# Altium PCB fader2_pcb.PcbDoc (part 2 of 3)
Units mil, origin at the board's own origin, x right, y up, seen from the top; angles counter-clockwise.
Board outline 5700 x 3900 mil, 6 copper layers (TOP, GND1, PWR1, PWR2, GND4, BOT), stack 48.468 mil thick; 196 components, 127 nets, 1359 pads, 531 vias.
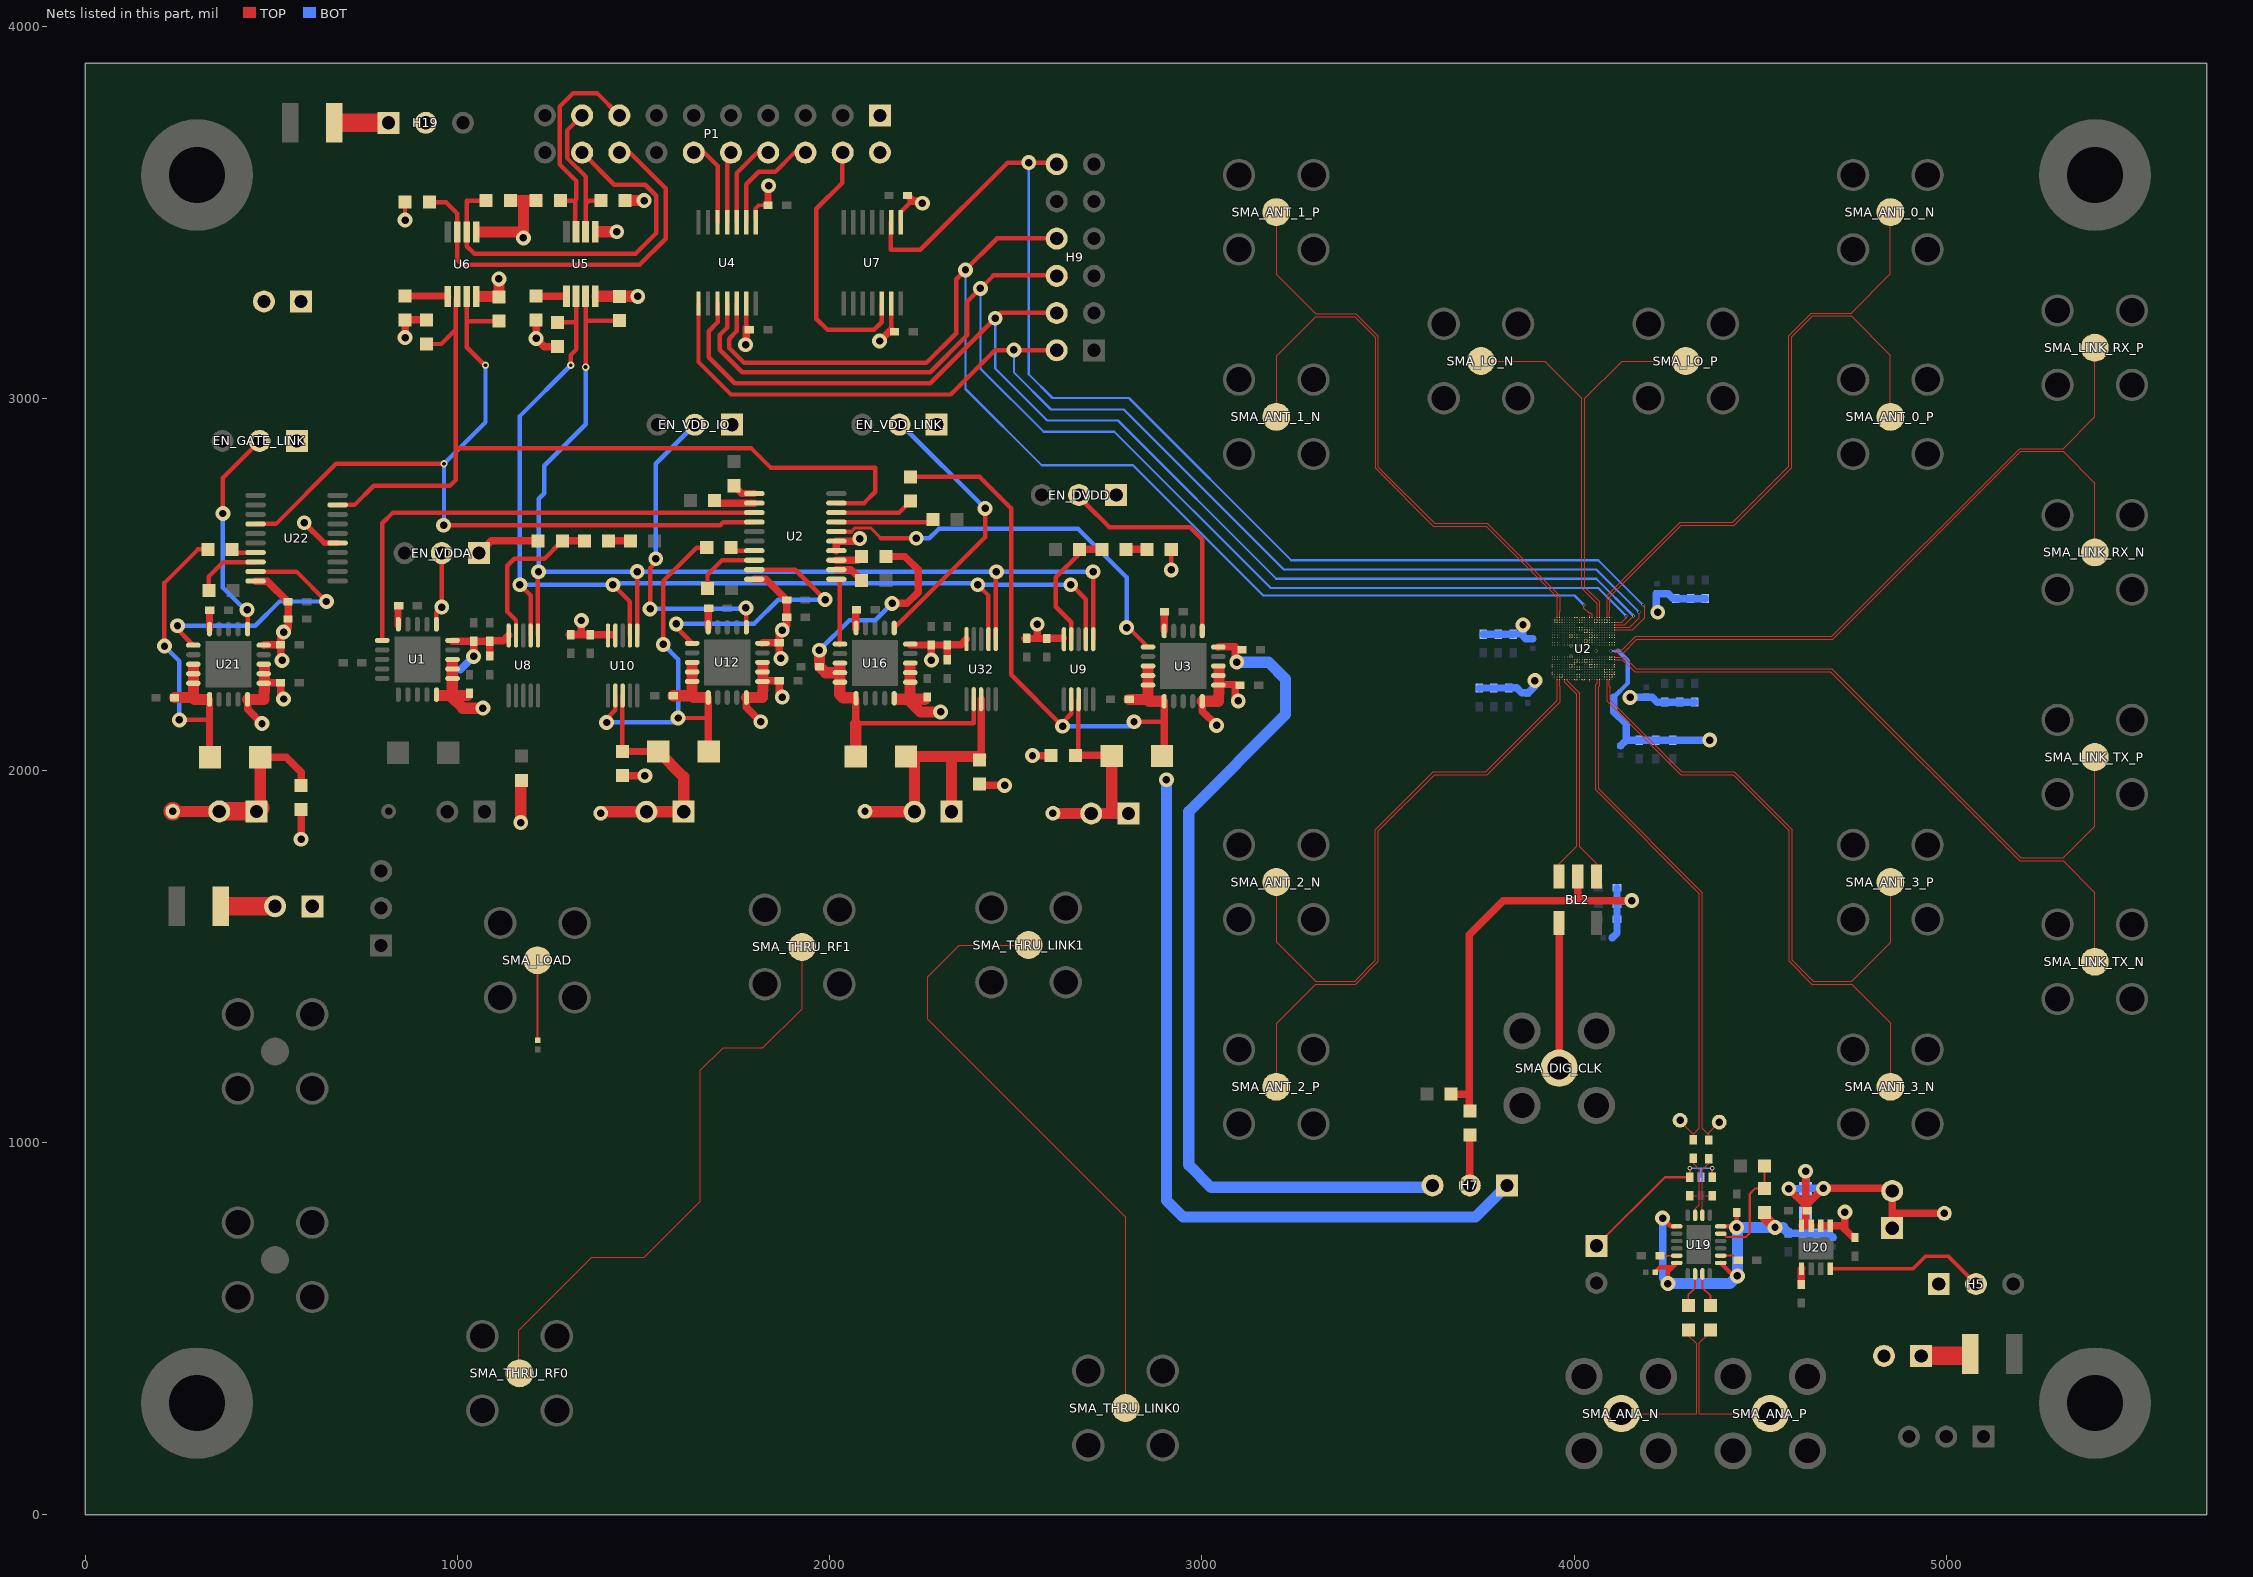
[diagram p6: the nets of this part, all layers, seen from the top]

## Part data
BL2: "Balun", Frequency Range=0.5MHz-550MHz, Manufacturer=Mini-Circuits, Manufacturer ID=TC1.5-52TG2+
C1 C4 C13 C14 C18 C19 C25 C29 C32 C34 C46 C48 C52 C64 C65 C66 C70 C78 C86 C99 C105 C113 C115: library part "cap 3p3uF", Manufacturer=TDK, Manufacturer ID=C1005X5R1A335K050BC, Package=0402, Digikey ID=445-13819-1-ND
C2 C23 C31 C33 C37 C38 C40 C90 C92 C95 C104 C114: library part "cap 1uF 0402", Manufacturer="Samsung Electro-Mechanics", Manufacturer ID=CL05A105MO5NNNC, Package=0402, Digikey ID=1276-1447-1-ND
C3 C17 C26 C47 C63 C69 C71 C75 C77: library part "cap 100nF", Manufacturer="Samsung Electro-Mechanics", Manufacturer ID=CL05B104KO5NNNC, Package=0402, Digikey ID=1276-1001-1-ND
C5 C21 C36 C39 C43 C50 C62 C84 C85 C88 C91 C96 C98 C102 C117: library part "cap 10nF", Manufacturer=Murata, Manufacturer ID=GCM155R71H103KA55D, Package=0402, Digikey ID=490-4762-1-ND
C6 C22 C51 C89 C100 C103 C118: library part "cap 100pF", Manufacturer=Murata, Manufacturer ID=GRM0335C1H101JA01D, Package=0201, Digikey ID=490-6113-1-ND
C8 C10 C67: library part "cap 22uF", Manufacturer=Murata, Manufacturer ID=GRM32ER71C226KE18L, Package=1210, Digikey ID=490-4524-1-ND
C11 C12: library part "cap 1uF 0603", Manufacturer=Murata, Manufacturer ID=GRM188R61A105KA61D, Package=0603, Digikey ID=490-1543-1-ND
C20 C30 C35 C49 C53 C87 C116: library part "cap 220nF", Manufacturer="Samsung Electro-Mechanics", Manufacturer ID=CL05B224KO5NNNC, Package=0402, Digikey ID=1276-1176-1-ND
C76: library part "cap 680pF", Manufacturer=Murata, Manufacturer ID=GRM0335C1E681JA01D, Package=0201, Digikey ID=490-14330-1-ND
EN_DVDD EN_GATE_LINK EN_VDD_IO EN_VDD_LINK EN_VDDA H5 H7 H16 H18 H19: Manufacturer=FCI, Manufacturer ID=68000-103HLF, Digikey ID=609-3461-ND
FB1 FB3 FB4 FB5 FB7 FB10: Current Rating=2A, Manufacturer=Wurth, Manufacturer ID=742792641, Package=0603, Digikey ID=732-1592-1-ND, Impedance="300 Ohm @ 100MHz"
H9: "Header, 6-Pin, Dual row", Manufacturer="Amphenol FCI", Manufacturer ID=67997-212HLF, Digikey ID=609-3237-ND
H13 H15 H17 H20 H25 H_DVDD H_GATE_LINK H_VDD_IO H_VDD_LINK H_VDDA: Manufacturer=FCI, Manufacturer ID=68001-202HLF, Digikey ID=609-3469-ND
P1: "Header, 10-Pin, Dual row", Manufacturer="Amphenol FCI", Manufacturer ID=67997-220HLF, Digikey ID=609-3239-ND
R1 R72: library part "res 1.5 Kohm", Manufacturer=Panasonic, Manufacturer ID=ERA-3AEB152V, Package=0603, Digikey ID=P1.5KDBCT-ND
R2: library part "res 4.32 Kohm", Manufacturer=Panasonic, Manufacturer ID=ERA-3AEB4321V, Package=0603, Digikey ID=P4.32KDBCT-ND
R3: library part "res 930 ohm", Manufacturer=Yageo, Manufacturer ID=RT0603DRD07931RL, Package=0603, Digikey ID=311-2391-1-ND
R4 R24 R38 R39 R41: library part "res 0.11 ohm", Manufacturer=Susumu, Manufacturer ID=RL1632R-R110-F, Package=1206, Digikey ID=RL16R.11FCT-ND
R5: library part "res 3 Kohm", Manufacturer=Panasonic, Manufacturer ID=ERA-3AEB302V, Package=0603, Digikey ID=P3.0KDBCT-ND
R6 R40: library part "res 2.67 Kohm", Manufacturer=Panasonic, Manufacturer ID=ERA-3AEB2671V, Package=0603, Digikey ID=P2.67KDBCT-ND
R8: library part "res 3.5 Kohm", Manufacturer=Panasonic, Manufacturer ID=ERA-3AEB3481V, Package=0603, Digikey ID=P3.48KDBCT-ND
R9 R30 R51 R52: library part "res 0 ohm 0603", Manufacturer=Panasonic, Manufacturer ID=ERJ-3GEY0R00V, Package=0603, Digikey ID=P0.0GCT-ND
R11 R12 R13 R14 R15 R16 R17 R18 R19 R20: library part "res 10 Kohm", Manufacturer=Panasonic, Manufacturer ID=ERA-3AEB103V, Package=0603, Digikey ID=P10KDBCT-ND
R21 R22 R23 R31 R32 R33: library part "res 1 Kohm", Manufacturer=Panasonic, Manufacturer ID=ERJ-3EKF1001V, Package=0603, Digikey ID=P1.00KHCT-ND
R36: library part "res 13 Kohm", Manufacturer=Panasonic, Manufacturer ID=ERA-3AEB133V, Package=0603, Digikey ID=P13KDBCT-ND
R44: library part "res 50 ohm", Manufacturer=Panasonic, Manufacturer ID=ERJ-1GEF49R9C, Package=0201, Digikey ID=P49.9ABCT-ND
R46 R47: library part "res 20 Kohm", Manufacturer=Panasonic, Manufacturer ID=ERJ-2RKF2002X, Package=0402, Digikey ID=P20.0KLCT-ND
R73: library part "res 300 ohm", Manufacturer=Panasonic, Manufacturer ID=ERA-3AEB301V, Package=0603, Digikey ID=P300DBCT-ND
SMA_ANA_N SMA_ANA_P: library part SMA_JOHNSON, "Johnson SMA", Manufacturer=Molex, Manufacturer ID=0733910060, Digikey ID=WM5543-ND
SMA_ANT_0_N SMA_ANT_0_P SMA_ANT_1_N SMA_ANT_1_P SMA_ANT_2_N SMA_ANT_2_P SMA_ANT_3_N SMA_ANT_3_P SMA_LINK_RX_N SMA_LINK_RX_P SMA_LINK_TX_N SMA_LINK_TX_P SMA_LO_N SMA_LO_P SMA_LOAD SMA_OPEN SMA_SHORT SMA_THRU_LINK0 SMA_THRU_LINK1 SMA_THRU_RF0 SMA_THRU_RF1: library part SMA_THRU_SMD, Manufacturer=Amphenol, Manufacturer ID=132134-15, Digikey ID=ACX1962-ND
SMA_DIG_CLK: library part SMA_JOHNSON_CUTOUT, "Johnson SMA With Cutout", Manufacturer=Molex, Manufacturer ID=0733910060, Digikey ID=WM5543-ND
TP_ANA_N TP_ANA_P TP_DVDD TP_GATE_LINK TP_VDD_BUFFER TP_VDD_IO TP_VDD_LINK TP_VDDA: library part Test_Point
U1 U3 U12 U16 U21: "Variable Voltage Regulator", Dropout Voltage="55mV @ 1.5A", Input Voltage=0.86V-5.5V, Manufacturer=TI, Manufacturer ID=TPS74201RGWR, Output Current=1.5A, Output Voltage=0.8V-3.6V, Digikey ID=296-19890-1-ND
U2: library part FADER2
U2 U22: "Digital Pot", Manufacturer="Analog Devices", Manufacturer ID=AD5254BRUZ1, Resistance=1k, Digikey ID=AD5254BRUZ1-ND
U4 U7: library part NLSV4T244, "Logic Translator", Manufacturer="ON Semiconductor", Package=TSSOP-14, Voltage Range=0.9V-4.5V, Digikey ID=NLSV4T244DTR2GOSCT-ND, Manufacturer ID=NLSV4T244DTR2G, Num. Channels=4
U5 U6: "I2C Repeater", Manufacturer=TI, Manufacturer ID=PCA9517DGKR, Package=8-VSSOP, Voltage Range A=0.9V-5.5V, Voltage Range B=2.7V-5.5V, Digikey ID=296-24730-1-ND
U8 U9 U10 U32: "OpAmp ADC", Manufacturer=Maxim, Manufacturer ID=MAX9612AUB+, Digikey ID=MAX9612AUB+-ND
U19: library part LTC6417CUDC#PBF, "Single Channel, Low Noise, High Linearity Differential Buffer / 16-Bit ADC Driver with Fast Clamp, 1600 MHz Typical GBW, 10000 V/us Typical SR, 4.75 to 5.25 V, 20-Pin QFN (UDC20), Commercial, Pb-Free", Manufacturer="Linear Technology", Supplier Part Number 1=LTC6417CUDC#PBF-ND, Channels (#)=1, ComponentLink1Description="Manufacturer URL", ComponentLink1URL=http://www.linear.com/, ComponentLink2Description=Datasheet, ComponentLink2URL=http://cds.linear.com/docs/en/datasheet/6417f.pdf, ComponentLink3Description="Package Specification", ComponentLink3URL=http://cds.linear.com/docs/en/packaging/QFN_20_05-08-1742.pdf, Digikey ID=LTC6417CUDC#PBF-ND, GBW (MHz) Typical=1600, Is (mA) Typical=123, Linear Technology Part Number=LTC6417, Manufacturer ID=LTC6417CUDC#PBF, Mounting Technology="Surface Mount", PackageDescription="20-Lead Plastic QFN, Body 3 x 4 mm, Pitch 0.5 mm", PackageReference=LT-UDC-20, PackageVersion="Rev Ø", PartNumber=LTC6417CUDC#PBF, RoHS=Pb-Free, SR (V/us) Typical=10000, Supplier 1=Digi-Key, Supplier 2=Farnell, Supplier 3=Newark, Supplier Part Number 2=2322431, Supplier Part Number 3=27W9503, Type=DIFF, Vos (mV) Typical=0.1, Vs Max (V)=5.25, Vs Min (V)=4.75
U20: library part TPS79650DRBR, "Single Output High PSRR LDO, 1 A, Fixed 5 V Output, 2.7 to 5.5 V Input, 8-pin SON (DRB), -40 to 125 degC, Green (RoHS & no Sb/Br)", Manufacturer="Texas Instruments", Supplier Part Number 1=296-21352-2-ND, Accuracy(%)=2, ComponentLink1Description="Manufacturer URL", ComponentLink1URL=http://www.ti.com/, ComponentLink2Description=Datasheet, ComponentLink2URL=http://www.ti.com/general/docs/lit/getliterature.tsp?genericPartNumber=TPS79650&fileType=pdf, ComponentLink3Description="Package Specification", ComponentLink3URL=http://www.ti.com/litv/pdf/mpds118h, DatasheetVersion=SLVS351N, Digikey ID=296-21352-1-ND, Eco-Plan="Green (RoHS & no Sb/Br)", Fixed Output Options(V)=5, Iout(Max)(A)=1, Iq(Typ)(mA)=0.26, Manufacturer ID=TPS79650DRBR, Mounting Technology="Surface Mount", PackageDescription="8-Pin Plastic Small Outline, Body 3 x 3 mm, Pitch 0.65 mm", PackageReference=DRB8-2400X1650TP, PackageVersion=4203482-2/K, PartNumber=TPS79650DRBR, SubFamily="Single Channel LDO", Supplier 1=Digi-Key, Supplier 2=Digi-Key, Supplier 3=Digi-Key, Supplier 4=Newark, Supplier 5=Mouser, Supplier Part Number 2=296-21352-1-ND, Supplier Part Number 3=296-21352-6-ND, Supplier Part Number 4=22M1831, Supplier Part Number 5=595-TPS79650DRBR, Vdo(Typ)(mV)=200, Vin(Max)(V)=5.5, Vin(Min)(V)=2.7, Vout Adj(Max)(V)=5, Vout Adj(Min)(V)=5

## Free pads (board coordinates)
  round 300 hole 150: 0(300,300) 0(300,3600) 0(5400,300) 0(5400,3600)

## Via types
v1: diameter 50, hole 28, TOP to BOT, 259 vias
v2: diameter 40, hole 20, TOP to BOT, tented both sides, 128 vias
v3: diameter 8, hole 6, TOP to BOT, tented both sides, 63 vias
v4: diameter 20, hole 10, TOP to BOT, 45 vias
v5: diameter 16, hole 6, TOP to BOT, tented both sides, 17 vias
v6: diameter 8, hole 6, TOP to BOT, 7 vias
v7: diameter 40, hole 20, TOP to BOT, 4 vias
v8: diameter 20, hole 10, TOP to BOT, tented both sides, 4 vias
v9: diameter 19.68, hole 7.87, TOP to BOT, 2 vias
v10: diameter 12, hole 6, TOP to BOT, tented both sides, 2 vias

## Nets (pads, with @x,y where several pads share a name; then routed paths per layer and width w, separated by ;. In a path a pad name is that pad's centre, name@x,y a point inside that pad or via, vN(x,y) a via of type N, cw(c..) or ccw(c..) an arc to the next point about the centre after c; other vN are vias at no path point)
ANA_MUX_N: C84.1 TP_ANA_N.1 U2.H26 | length 1399
  TOP w3: U2.H26@4061.85,2244.21 U2.H26@4061.85,2243.89 4061.85,2234.15 4057.96,2230.26 4057.96,1947.62 4337.05,1668.53 4337.05,1039.05 4320,1022 4285,1057 TP_ANA_N.1@4285,1060
ANA_MUX_P: C85.1 TP_ANA_P.1 U2.G26 | length 1392
  TOP w3: U2.G26@4068.55,2244.21 U2.G26@4068.55,2243.89 4068.55,2226.83 4066.62,2224.9 4066.62,1950.13 4344.94,1671.8 4344.94,1038.05 4362,1021 4362,1027 TP_ANA_P.1@4390,1055
ANT_0_N: SMA_ANT_0_N.1 U2.D1 | length 1549.7
  TOP w3: U2.D1@4088.63,2411.22 4088.63,2428.63 ; 4088.73,2428.63 4088.73,2470.1 4284.84,2666.22 4426.22,2666.22 4577.11,2817.11 4577.11,3168.27 4637.79,3228.94 4745,3228.94 4850,3333.94 SMA_ANT_0_N.1@4850,3500
ANT_0_P: SMA_ANT_0_P.1 U2.C1 | length 1537.2
  TOP w3: U2.C1@4095.32,2411.22 4095.32,2428.63 4096.62,2429.92 4096.62,2466.83 4288.11,2658.33 4429.49,2658.33 4431.8,2660.64 4585,2813.84 4585,3165 4641.05,3221.05 4745,3221.05 4850,3116.05 SMA_ANT_0_P.1@4850,2950
ANT_1_N: SMA_ANT_1_N.1 U2.AD1 | length 1534.4
  TOP w3: SMA_ANT_1_N.1@3201.7,2947.83 3201.7,3113.89 3306.7,3218.89 3410.64,3218.89 3466.7,3162.83 3466.7,2811.67 3622.21,2656.16 3763.59,2656.16 3954.77,2464.98 U2.AD1@3954.77,2411.22
ANT_1_P: SMA_ANT_1_P.1 U2.AC1 | length 1549.7
  TOP w3: SMA_ANT_1_P.1@3201.7,3497.83 3201.7,3331.78 3306.7,3226.78 3413.91,3226.78 3474.59,3166.1 3474.59,2814.94 3625.48,2664.05 3766.85,2664.05 3962.97,2467.93 3962.97,2426.46 ; U2.AC1@3961.46,2411.22 3961.46,2428.63
ANT_2_N: SMA_ANT_2_N.1 U2.AD26 | length 1536.7
  TOP w3: SMA_ANT_2_N.1@3201.53,1705 3201.53,1538.95 3306.53,1433.95 3410.47,1433.95 3466.53,1490 3466.53,1841.16 3622.04,1996.67 3763.42,1996.67 3954.77,2188.02 U2.AD26@3954.77,2243.9
ANT_2_P: SMA_ANT_2_P.1 U2.AC26 | length 1549.7
  TOP w3: SMA_ANT_2_P.1@3201.53,1155 3201.53,1321.06 3306.53,1426.06 3413.74,1426.06 3474.42,1486.73 3474.42,1837.89 3625.31,1988.78 3766.68,1988.78 3962.8,2184.9 3962.8,2226.37 ; 3961.46,2226.49 U2.AC26@3961.46,2243.9
ANT_3_N: SMA_ANT_3_N.1 U2.D26 | length 1552.6
  TOP w3: U2.D26@4088.63,2243.89 4088.63,2186.37 4286.22,1988.78 4427.59,1988.78 4578.48,1837.89 4578.48,1486.73 4639.16,1426.06 4746.37,1426.06 4851.37,1321.06 SMA_ANT_3_N.1@4851.37,1155 ; SMA_ANT_3_N.1@4848.5,1151.5 SMA_ANT_3_N.1@4850,1150
ANT_3_P: SMA_ANT_3_P.1 U2.C26 | length 1540
  TOP w3: U2.C26@4095.32,2243.89 4095.32,2226.49 4097.99,2223.81 4097.99,2188.17 4289.49,1996.67 4430.86,1996.67 4586.37,1841.16 4586.37,1490 4642.43,1433.95 4746.37,1433.95 4851.37,1538.95 SMA_ANT_3_P.1@4851.37,1705 ; SMA_ANT_3_P.1@4848.5,1698.5 SMA_ANT_3_P.1@4850,1700
buf_vcm_in: C17.1 H13.1 R46.2 R47.1 | length 459.5
  TOP w5: R46.2@4311.21,907.06 v10(4311.21,931.06) ; R47.1@4371.21,907.06 v10(4371.21,931.06)
  TOP w5.75: H13.1@4060.05,722.67 4244.38,907 4311.16,907 R46.2@4311.21,907.06
  BOT w5: v10(4311.21,931.06) 4341.21,931.06 ; C17.1@4341.21,907.06 4341.21,931.06 ; v10(4371.21,931.06) 4341.21,931.06
CLK_DIG_OVERRIDE_N: BL2.1 U2.AA26 | length 562.1
  TOP w3: BL2.1@3960,1715 3960,1749 4007.11,1796.11 4007.11,2204.03 3974.84,2236.3 U2.AA26@3974.84,2243.9 U2.AA26@3974.84,2244.21
CLK_DIG_OVERRIDE_P: BL2.3 U2.Y26 | length 561.7
  TOP w3: U2.Y26@3981.54,2244.21 U2.Y26@3981.54,2243.89 3981.54,2240.76 4015,2207.3 4015,1795 4060,1750 BL2.3@4060,1715
CLK_DIG_OVERRIDE_SMA: BL2.6 SMA_DIG_CLK.1 | length 385
  TOP w20: SMA_DIG_CLK.1@3960,1200 BL2.6@3960,1585
CLK_DIG_OVERRIDE_VCM: BL2.2 C30.1 C98.1 C99.1 C100.1 R2.1 R36.2 | length 1202.4
  TOP w20: 3690.5,1130 3718,1130 ; R36.2@3718,1102 3718,1130 ; BL2.2@4010,1710 4010,1650 ; v2(4155,1650) 4010,1650 ; 3718,1130 3718,1558 3810,1650 4010,1650
  BOT w20: C100.1@4103,1550 4115.5,1562.5 C98.1@4115.5,1600 C30.1@4115.5,1640 ; C99.1@4115.5,1685 C30.1@4115.5,1640 ; v2(4155,1650) 4125.5,1650 C30.1@4115.5,1640
DVDD: C19.1 C20.1 C21.1 C22.1 FB3.2 U2.AA12 U2.AA13 U2.AA16 U2.AA17 U2.B22 U2.B23 U2.C22 U2.C23 U2.D22 U2.D23 U2.E22 U2.E23 U2.F2 U2.F3 U2.F14 U2.F15 U2.G2 U2.G3 U2.G14 U2.G15 U2.H2 U2.H3 U2.H8 U2.H9 U2.H14 U2.H15 U2.H20 U2.H21 U2.J2 U2.J3 U2.J8 U2.J9 U2.J14 U2.J15 U2.J20 U2.J21 U2.K6 U2.K7 U2.K8 U2.K9 U2.K18 U2.K19 U2.K20 U2.K21 U2.L6 U2.L7 U2.L8 U2.L9 U2.L18 U2.L19 U2.L20 U2.L21 U2.M6 U2.M7 U2.M18 U2.M19 U2.N6 U2.N7 U2.N18 U2.N19 U2.P18 U2.P19 U2.R18 U2.R19 U2.T8 U2.T9 U2.T18 U2.T19 U2.U8 U2.U9 U2.U18 U2.U19 U2.U20 U2.U21 U2.V8 U2.V9 U2.V12 U2.V13 U2.V16 U2.V17 U2.V20 U2.V21 U2.W8 U2.W9 U2.W12 U2.W13 U2.W16 U2.W17 U2.W20 U2.W21 U2.Y12 U2.Y13 U2.Y16 U2.Y17 | length 234.2
  TOP w3: U2.U20@4001.62,2284.05 U2.U19@4001.62,2290.74
  TOP w20: v2(2545,2040) FB3.2@2595,2040
  BOT w10: C22.1@3876.84,2208.72 C22.1@3877.1,2208.72
  BOT w20: C19.1@3744.84,2221.22 3784.84,2221.44 3824.84,2221.66 3845.84,2221.78 3858.9,2208.72 C22.1@3876.84,2208.72 ; C22.1@3877.1,2208.72 3894.84,2226.47 v2(3894.84,2241.22)
  other v3: 4085.17,2267.51 3991.37,2280.8 4044.97,2280.83 4004.96,2294.14 4031.51,2294.08 3991.68,2307.62 4058.47,2321 3991.72,2334.42 3991.66,2361.08 4045.11,2361.05 4031.65,2374.4 4058.7,2401.3
DVDD_EN: EN_DVDD.2 U3.11 | length 600.2
  TOP w12: EN_DVDD.2@2687,2718 2751.17,2653.83 2967.82,2653.83 3001.18,2620.46 U3.11@3001.18,2374.8
DVDD_FB: U2.6 U3.16 | length 1070.7
  TOP w8: 2058.6,2641.62 2068.81,2651.83 2109.82,2651.83 2137.82,2623.83
  TOP w12: U2.6@2018.05,2641.62 2058.6,2641.62 ; 2137.82,2623.83 v2(2232.82,2623.83) ; v2@2801.82,2385.19 U3.16@2855.51,2331.5
  BOT w12: v2(2232.82,2623.83) 2267.82,2623.83 2292.82,2648.83 2667.82,2648.83 2797.82,2518.83 v2(2797.82,2383.83)
DVDD_REG: C104.1 R41.1 R52.2 U3.1 U3.18 U3.19 U3.20 U9.2 | length 1600.1
  TOP w12: R52.2@2217.82,2788.83 2402.82,2788.83 2487.82,2703.83 2487.82,2256.83 v2(2625.82,2118.83) 2625.82,2128.83 2649.13,2152.14 U9.2@2649.13,2191.12 ; v2(2817.82,2130.83) 2898.82,2130.83
  TOP w20: 2853.82,2190.83 2855.51,2189.13 2858.82,2185.83 ; R41.1@2898.82,2061.83 2898.82,2130.83 U3.1@2898.82,2185.83
  TOP w30: C104.1@2804.82,2190.83 2853.82,2190.83 ; 2855.51,2189.13 2855.51,2270.83 ; 2858.82,2185.83 2889.82,2185.83
  BOT w12: v2(2625.82,2118.83) 2805.82,2118.83 v2(2817.82,2130.83)
DVDD_RS: FB3.1 H_DVDD.1 H_DVDD.2 R41.2 TP_DVDD.1 U9.3 | length 609.2
  TOP w12: FB3.1@2667.82,2040.83 U9.3@2667.82,2190.12
  TOP w20: FB3.1@2667.82,2040.61 2668.04,2040.83 R41.2@2764.82,2040.83
  TOP w30: TP_DVDD.1@2599.92,1884.92 2600.69,1884.14 H_DVDD.2@2702.82,1884.14 2757.82,1884.14 ; R41.2@2764.82,2040.83 2757.82,2033.83 2757.82,1884.14 ; H_DVDD.1@2802.82,1884.14 2757.82,1884.14
FRAC13_BOT: R22.2 R23.1 U9.9 | length 344.9
  TOP w12: U9.9@2649.13,2352.54 2649.13,2398.3 2607.82,2439.61 2607.82,2518.83 2671.82,2582.83 R23.1@2671.82,2593.83
  TOP w20: R23.1@2671.82,2593.83 R22.2@2731.82,2593.83
FRAC13_TOP: R32.2 R33.1 | length 59
  TOP w20: R32.2@1405.95,2616.97 R33.1@1464.95,2616.97
FRAC23_BOT: R21.2 R22.1 | length 56
  TOP w20: R22.1@2796.82,2593.83 R21.2@2852.82,2593.83
FRAC23_TOP: R31.2 R32.1 U8.9 | length 431.8
  TOP w12: U8.9@1157.31,2362.71 1157.31,2403.33 1133.82,2426.81 1133.82,2549.83 1152.82,2568.83 1233.8,2568.83 R31.2@1281.95,2616.97
  TOP w20: R31.2@1281.95,2616.97 R32.1@1340.95,2616.97
GATE_LINK: C115.1 C116.1 C117.1 C118.1 FB7.2 U2.B14 U2.B15 U2.C14 U2.C15 | length 626.3
  TOP w20: v2(580,1815) FB7.2@580,1895
  BOT w3: C117.1@4174.84,2081.22 C117.1@4174.93,2081.14
  BOT w6: v3(4098.76,2321) 4118.83,2321
  BOT w12: 4106.93,2196.93 4145,2235 4145,2294.84 4118.83,2321
  BOT w20: 4106.93,2196.93 4106.93,2157.71 4139.84,2124.79 4139.84,2081.22 ; C118.1@4124.84,2066.22 4139.84,2081.22 ; C117.1@4174.84,2081.22 4139.84,2081.22 ; C117.1@4174.93,2081.14 C115.1@4265.26,2081.14 v2@4364.84,2081.14
  other v2: 4364.84,2081.22
GATE_LINK_EN: EN_GATE_LINK.2 U21.11 | length 579.8
  TOP w12: v2(369.82,2690.32) 369.82,2786.73 EN_GATE_LINK.2@468.41,2885.32 ; v2(434.82,2431.83) 436.18,2430.46 U21.11@436.18,2379.8
  BOT w12: v2(369.82,2690.32) 369.82,2490.83 431.82,2428.83 v2(434.82,2431.83)
GATE_LINK_FB: U21.16 U22.19 | length 726.4
  TOP w12: v2@236.82,2390.19 U21.16@290.51,2336.5 ; U22.19@457.58,2534.26 567.38,2534.26 v2(647.82,2453.83)
  BOT w12: v2(247.82,2388.83) 456.83,2388.83 521.83,2453.83 v2(647.82,2453.83)
GATE_LINK_REG: C114.1 R4.1 R73.2 U21.1 U21.18 U21.19 U21.20 | length 918.6
  TOP w12: v2@212.82,2327.83 v2(212.82,2333.83) 212.82,2503.83 302.82,2593.83 R73.2@329.82,2593.83 ; v2(252.82,2135.83) 333.82,2135.83
  TOP w20: 288.82,2195.83 290.51,2194.13 293.82,2190.83 ; 333.82,2066.83 333.82,2135.83 U21.1@333.82,2190.83
  TOP w30: C114.1@239.82,2195.83 288.82,2195.83 ; 290.51,2194.13 290.51,2275.83 ; 293.82,2190.83 324.82,2190.83
  BOT w12: v2(212.82,2333.83) 252.82,2293.83 v2(252.82,2135.83)
GATE_LINK_RS: FB7.1 H_GATE_LINK.1 H_GATE_LINK.2 R4.2 TP_GATE_LINK.1 | length 535.7
  TOP w20: R4.2@470,2035 540,2035 580,1995 FB7.1@580,1960
  TOP w30: TP_GATE_LINK.1@235,1890 H_GATE_LINK.2@360,1890 ; H_GATE_LINK.1@470,1900 R4.2@470,2035
  TOP w50: H_GATE_LINK.2@360,1890 H_GATE_LINK.1@460,1890 H_GATE_LINK.1@470,1900
I2C_SCL_I: R13.2 U5.7 U8.6 U9.6 U10.6 U32.6 | length 3080.6
  TOP w12: U8.6@1216.31,2362.65 v2@1216.31,2533.83 ; v8@1344.12,3083.94 1344.12,3204.74 ; U5.7@1344.12,3274.12 1344.12,3204.74 ; R13.2@1435.33,3208.74 1348.12,3208.74 1344.12,3204.74 ; U10.6@1483.19,2362.54 v2(1483.19,2534.2) ; U32.6@2446.31,2352.65 v2@2446.31,2533.83 ; v2(2707.82,2533.83) 2708.19,2533.46 U9.6@2708.19,2352.54
  BOT w12: v2(1217.82,2533.83) v2@1218.19,2534.2 ; v8(1344.33,3083.74) 1344.33,2930.34 1232.82,2818.83 1232.82,2744.83 1218.19,2730.2 v2@1218.19,2534.2 ; v2(2707.82,2533.83) v2(2447.82,2533.83) 1483.56,2533.83 v2(1483.19,2534.2) v2@1218.19,2534.2
I2C_SCL_I_FPGA: P1.17 R11.2 U5.2 | length 393.6
  TOP w12: P1.17@1334.33,3759.33 1294.41,3719.41 1294.41,3645.66 1345.33,3594.74 1345.33,3522.74 ; U5.2@1344.12,3447.35 1345.33,3448.56 1345.33,3522.74 ; R11.2@1385.33,3531.18 1353.77,3531.18 1345.33,3522.74
I2C_SCL_V: R17.2 U2.14 U6.7 U22.14 | length 2180.3
  TOP w12: U22.14@457.58,2662.21 512.21,2662.21 673.83,2823.83 v8(963.82,2823.83) ; v2(962.82,2658.83) 1706.05,2658.83 1714.43,2667.21 U2.14@1797.58,2667.21 ; U6.7@1025.34,3273.12 1025.34,3206.74 ; v8(1075.33,3088.74) 1073.33,3088.74 1025.34,3136.72 1025.34,3206.74 ; R17.2@1111.33,3206.96 1025.56,3206.96 1025.34,3206.74
  BOT w12: v2(962.82,2658.83) 963.82,2659.83 v8(963.82,2823.83) 1075.33,2935.34 v8(1075.33,3088.74)
I2C_SCL_V_FPGA: P1.18 R15.2 U6.2 | length 1062.2
  TOP w12: 1025.34,3531.18 U6.2@1025.34,3446.35 1025.34,3408.72 1045.33,3388.74 1479.41,3388.74 1534.41,3443.74 1534.41,3543.82 1504.41,3573.82 1421.18,3573.82 P1.18@1335,3660 ; 1025.34,3531.18 R15.2@1077.33,3531.18
I2C_SDA_I: R14.2 U5.6 U8.7 U9.7 U10.7 U32.7 | length 2997.8
  TOP w12: v2(1167.82,2498.83) 1196.62,2470.02 U8.7@1196.62,2362.65 ; R14.2@1269.33,3203.74 1318.33,3203.74 1319.33,3202.74 ; v8(1304.41,3088.82) 1304.41,3116.09 1319.33,3131.01 1319.33,3202.74 ; U5.6@1318.53,3274.12 1319.33,3273.33 1319.33,3202.74 ; v2(1417.82,2498.83) 1463.5,2453.14 U10.7@1463.5,2362.54 ; v2(2397.82,2498.83) 2426.62,2470.02 U32.7@2426.62,2352.65 ; v2(2647.82,2498.83) 2649.82,2498.83 2688.5,2460.14 U9.7@2688.5,2352.54
  BOT w12: v8(1304.41,3088.82) 1167.82,2952.23 v2(1167.82,2498.83) v2(1417.82,2498.83) 1421.82,2502.83 2393.82,2502.83 v2(2397.82,2498.83) v2(2647.82,2498.83)
I2C_SDA_I_FPGA: P1.15 R12.2 U5.3 | length 597.5
  TOP w12: R12.2@1276.33,3531.18 1316.53,3531.18 ; U5.3@1318.53,3447.35 1316.53,3449.35 1316.53,3531.18 ; P1.15@1435,3760 1375,3820 1311.1,3820 1274.41,3783.3 1274.41,3628.82 1319.41,3583.82 1319.41,3534.06 1316.53,3531.18
I2C_SDA_V: R18.2 U2.9 U6.6 U22.9 | length 2264.8
  TOP w12: U22.9@678.05,2713.39 723.39,2713.39 775,2765 980,2765 995.33,2780.33 995.33,2865 ; R18.2@917.33,3145.74 956.33,3145.74 995.33,3184.74 ; U6.6@999.75,3273.12 995.33,3268.7 995.33,3184.74 ; U2.9@2018.05,2718.39 2092.39,2718.39 2122.82,2748.83 2122.82,2813.83 1841.17,2813.83 1790,2865 995.33,2865 ; 995.33,2865 995.33,3184.74
I2C_SDA_V_FPGA: P1.16 R16.2 U6.3 | length 1105.5
  TOP w12: R16.2@924.33,3526.74 969.33,3526.74 999.75,3496.31 U6.3@999.75,3446.35 999.75,3372.31 1013.33,3358.74 1489.33,3358.74 1559.41,3428.82 1559.41,3563.66 1463.06,3660 P1.16@1435,3660
L1: U2.L1 | length 5.9
  TOP w3: U2.L1@4041.77,2411.22 4041.77,2417.11
L26: U2.L26 | length 5.9
  TOP w3: 4041.77,2238 U2.L26@4041.77,2243.89
LINK_CM_RX_1_N: SMA_LINK_RX_N.1 U2.A15 | length 1735.1
  TOP w3: U2.A15@4108.7,2317.83 4134.47,2317.83 4168.66,2352.03 4695.4,2352.03 5200.27,2856.9 5314.21,2856.9 5399.21,2771.9 SMA_LINK_RX_N.1@5399.21,2585.85
LINK_CM_RX_1_P: SMA_LINK_RX_P.1 U2.A14 | length 1735.6
  TOP w3: U2.A14@4108.7,2324.53 4130,2324.53 4165.39,2359.92 4692.13,2359.92 5197,2864.79 5314.21,2864.79 5399.21,2949.79 SMA_LINK_RX_P.1@5399.21,3135.85
LINK_CM_TX_1_N: SMA_LINK_TX_N.1 U2.A18 | length 1737.9
  TOP w3: U2.A18@4108.7,2297.75 4130,2297.75 4162.75,2265 4688.9,2265 5197,1756.9 5314.21,1756.9 5399.21,1671.9 SMA_LINK_TX_N.1@5399.21,1485.85 SMA_LINK_TX_N.1@5397.71,1487.35
LINK_CM_TX_1_P: SMA_LINK_TX_P.1 U2.A17 | length 1737.4
  TOP w3: U2.A17@4108.7,2304.45 4135.39,2304.45 4166.95,2272.89 4692.17,2272.89 5200.27,1764.79 5314.21,1764.79 5399.21,1849.79 SMA_LINK_TX_P.1@5399.21,2035.85 SMA_LINK_TX_P.1@5397.71,2034.35
LO_OVERRIDE_N: SMA_LO_N.1 U2.H1 | length 918.2
  TOP w3: SMA_LO_N.1@3750,3100 3921.05,3100 4021.05,3000 4021.05,2488.93 4061.85,2448.13 U2.H1@4061.85,2411.22
LO_OVERRIDE_P: SMA_LO_P.1 U2.G1 | length 917.7
  TOP w3: U2.G1@4068.55,2411.22 4068.55,2452.6 4028.94,2492.2 4028.94,3000 4128.94,3100 SMA_LO_P.1@4300,3100
NetC11_1: C11.1 U19.18 | length 97.6
  TOP w5: C11.1@4306.97,557.08 C11.1@4306.97,562.08 4306.97,591.76 4325.21,610 U19.18@4325.21,647.1
NetC12_2: C12.2 U19.19 | length 104.2
  TOP w5: U19.19@4344.9,647.1 4344.9,610 4366.97,587.92 C12.2@4366.97,562.08 C12.2@4366.97,552.08
NetC18_1: C18.1 U19.15 | length 50.5
  TOP w5: C18.1@4225.05,695.84 C18.1@4231.05,695.84 U19.15@4275.53,695.84
NetC39_1: C39.1 U16.15 | length 52.8
  TOP w20: U16.15@2070.31,2380.24 2070.31,2430.24 C39.1@2072.31,2432.24
NetC43_1: C43.1 U12.15 | length 51.4
  TOP w20: U12.15@1673.82,2384.8 1673.82,2434.83 C43.1@1674.82,2435.83
NetC62_1: C62.1 U1.15 | length 52.8
  TOP w20: U1.15@840.31,2390.24 840.31,2440.24 C62.1@842.31,2442.24
NetC75_1: C75.1 U19.2 | length 52.8
  TOP w5: U19.2@4394.58,695.84 U19.2@4394.11,696.31 4428.58,696.31 C75.1@4441.05,683.84
NetC91_1: C91.1 U20.5 | length 42.6
  TOP w20: C91.1@4610.05,619 4610.05,659.31 U20.5@4611.67,660.93
NetC96_1: C96.1 U21.15 | length 51.4
  TOP w20: U21.15@333.82,2379.8 333.82,2429.83 C96.1@334.82,2430.83
NetC102_1: C102.1 U3.15 | length 51.4
  TOP w20: U3.15@2898.82,2374.8 2898.82,2424.83 C102.1@2899.82,2425.83
NetH7_2: H7.2 R36.1 | length 135
  TOP w20: H7.2@3720,885 R36.1@3720,1020
NetR1_2: R1.2 U2.2 | length 79.5
  TOP w20: U2.2@2018.05,2539.26 2057.38,2539.26 R1.2@2085.82,2510.83
NetR3_1: R3.1 U2.3 | length 71.9
  TOP w12: R3.1@2075.84,2564.85 R3.1@2085.82,2574.83
  TOP w20: U2.3@2018.05,2564.85 R3.1@2075.84,2564.85
NetR5_2: R5.2 U2.18 | length 178.9
  TOP w12: R5.2@1671.82,2488.83 1671.82,2525.83 1710.84,2564.85 U2.18@1797.58,2564.85
NetR6_2: R6.2 U2.12 | length 109.4
  TOP w20: R6.2@1690.82,2724.83 1697.25,2718.39 U2.12@1797.58,2718.39
NetR8_1: R8.1 U2.17 | length 66.2
  TOP w12: R8.1@1734.82,2598.83 1743.2,2590.44 U2.17@1797.58,2590.44
NetR9_1: R9.1 U2.11 | length 63.4
  TOP w20: R9.1@1742.82,2764.83 1763.66,2743.98 U2.11@1797.58,2743.98
NetR19_1: R19.1 U5.5 | length 81.9
  TOP w20: R19.1@1211.33,3274.74 1211.94,3274.12 U5.5@1292.94,3274.12
NetR20_1: R20.1 U6.5 | length 115.5
  TOP w20: R20.1@859.33,3274.74 972.55,3274.74 U6.5@974.16,3273.12
NetR40_2: R40.2 U2.7 | length 262.5
  TOP w12: U2.7@2018.05,2667.21 2271.2,2667.21 R40.2@2277.82,2673.83
NetR44_1: R44.1 SMA_LOAD.1 | length 216.3
  TOP w5: R44.1@1215.31,1275.14 SMA_LOAD.1@1215.31,1491.45
NetR52_1: R52.1 U2.8 | length 212.6
  TOP w12: U2.8@2018.05,2692.8 2186.79,2692.8 R52.1@2217.82,2723.83
NetR72_2: R72.2 U22.18 | length 178.9
  TOP w12: R72.2@331.82,2483.83 331.82,2520.83 370.84,2559.85 U22.18@457.58,2559.85
NetR73_1: R73.1 U22.17 | length 66.2
  TOP w12: R73.1@394.82,2593.83 403.2,2585.44 U22.17@457.58,2585.44
NetU2_A8: U2.A8 U2.A9 U2.B8 U2.B9 U2.C8 U2.C9
NetU2_A11: U2.A11 U2.A12 U2.B11 U2.B12 U2.C11 U2.C12
NetU2_A20: U2.A20 U2.A21 | length 6.7
  TOP w3: U2.A21@4108.7,2277.36 U2.A20@4108.7,2284.05
NetU2_A23: U2.A23 U2.A24 | length 6.7
  TOP w3: U2.A24@4108.7,2257.28 U2.A23@4108.7,2263.97
NetU2_AD8: U2.AD8 U2.AD9 U2.AE8 U2.AE9 U2.AF8 U2.AF9
NetU2_AD11: U2.AD11 U2.AD12 U2.AE11 U2.AE12 U2.AF11 U2.AF12
NetU2_AD14: U2.AD14 U2.AD15 U2.AE14 U2.AE15 U2.AF14 U2.AF15
NetU2_AD17: U2.AD17 U2.AD18 U2.AE17 U2.AE18 U2.AF17 U2.AF18
NetU2_AF20: U2.AF20 U2.AF21 | length 6.7
  TOP w3: U2.AF21@3941.38,2277.36 U2.AF20@3941.38,2284.05
NetU2_AF23: U2.AF23 U2.AF24 | length 6.7
  TOP w3: U2.AF24@3941.38,2257.28 U2.AF23@3941.38,2263.97
NetU2_N1: U2.N1 U2.P1 | length 6.7
  TOP w3: U2.P1@4021.7,2411.22 U2.N1@4028.39,2411.22
NetU2_N26: U2.N26 U2.P26 | length 6.7
  TOP w3: U2.P26@4021.7,2243.89 U2.N26@4028.39,2243.89
NetU2_P2: U2.P2 U2.P3 U2.R2 U2.R3
NetU2_P5: U2.P5 U2.P6 U2.R5 U2.R6
NetU2_R21: U2.R21 U2.R22 U2.T21 U2.T22
NetU2_R24: U2.R24 U2.R25 U2.T24 U2.T25
NetU2_T1: U2.T1 U2.U1 | length 6.7
  TOP w3: U2.U1@4001.62,2411.22 U2.T1@4008.31,2411.22
NetU2_T26: U2.T26 U2.U26 | length 6.7
  TOP w3: U2.U26@4001.62,2243.89 U2.T26@4008.31,2243.89
PWRADJ: R30.2 R51.1 U19.5 | length 291.2
  TOP w5.75: U19.5@4402,754.3 4410.17,746.12 4461.12,746.12 4472.05,757.05 4472.05,862 4487.05,877 R30.2@4512.05,877 ; R51.1@4507.05,932 4512.05,927 R30.2@4512.05,877 ; R30.2@4517.05,877 R30.2@4512.05,877
RESET: H9.8 U2.K1 U4.12 | length 3515.9
  TOP w3: v6(4026.62,2444.53) 4026.62,2435.79 4039.29,2423.11 4044.26,2423.11 4048.47,2418.91 U2.K1@4048.47,2411.22
  TOP w12: U4.12@1750,3254.57 1750,3180 1730,3160 1730,3135 1770,3095 2260,3095 2340,3175 2340,3320 v2(2365,3345) 2450,3430 2608.82,3430 H9.8@2610,3428.82
  BOT w6: v2(2365,3345) 2365,3025 2570,2820 2815,2820 3165,2470 4001.14,2470 v6(4026.62,2444.53)
RESET_FPGA: P1.6 U4.2 | length 296.5
  TOP w12: U4.2@1775.59,3473.07 1775.59,3575 1809.41,3608.82 1854.41,3608.82 1905.59,3660 P1.6@1935,3660
rx_buf_in_N: C84.2 R46.1 U19.9 | length 190.3
  TOP w3: R46.1@4311.21,857.06 4336.11,857.06 ; C84.2@4320,958 4320,944 4337.05,926.94 4337.05,833.67 4325.21,821.83 U19.9@4325.21,804.58
rx_buf_in_P: C85.2 R47.2 U19.8 | length 186.5
  TOP w3: U19.8@4344.9,804.58 U19.8@4344.9,804.58 4344.94,856.9 4345.1,857.06 R47.2@4371.21,857.06 ; 4344.94,857.21 4344.94,926.94 4362,944 C85.2@4362,957 C85.2@4362,958
rx_buf_out_N: C11.2 SMA_ANA_N.1 | length 428.4
  TOP w3: SMA_ANA_N.1@4127,272 4329.11,272 4329.11,459.94 C11.2@4301.97,487.08
rx_buf_out_P: C12.1 SMA_ANA_P.1 | length 430.4
  TOP w3: C12.1@4361.97,487.08 4337,462.11 4337,272 SMA_ANA_P.1@4526.97,272 SMA_ANA_P.1@4542,272
SCAN_CLK: H9.2 U2.A5 U4.8 | length 3303.9
  TOP w3: U2.A5@4108.7,2384.76 4149.76,2384.76 4175,2410 v6(4175,2425)
  TOP w12: U4.8@1647.64,3254.57 1647.64,3097.36 1735,3010 2325.51,3010 2444.33,3128.82 H9.2@2610,3128.82
  BOT w6: v2(2495,3130) 2495,3070 2595,2970 2790,2970 3220,2540 4060,2540 v6(4175,2425)
scan_clk_FPGA: P1.12 U4.5 | length 229.8
  TOP w12: P1.12@1635,3660 1663.06,3660 1698.82,3624.25 U4.5@1698.82,3473.07
SCAN_EN: H9.4 U2.A4 U4.10 | length 3404.1
  TOP w3: U2.A4@4108.7,2391.46 4136.46,2391.46 v6(4160,2415)
  TOP w12: U4.10@1698.82,3254.57 1698.82,3203.82 1675,3180 1675,3110 1745,3040 2270,3040 v2(2445,3215) 2460,3230 H9.4@2630.51,3230
  BOT w6: v2(2445,3215) 2445,3080 2585,2940 2775,2940 3200,2515 4060,2515 v6(4160,2415)
scan_en_FPGA: P1.10 U4.4 | length 191.3
  TOP w12: U4.4@1724.41,3473.07 1724.41,3649.41 P1.10@1735,3660
SCAN_IN: H9.6 U2.A3 U4.11 | length 3516.4
  TOP w3: U2.A3@4108.7,2398.15 4128.15,2398.15 4140,2410 v6(4140,2415)
  TOP w12: U4.11@1724.41,3254.57 1724.41,3189.41 1705,3170 1705,3130 1765,3070 2270,3070 2370,3170 2370,3260 v2(2405,3295) 2440,3330 2628.15,3330 H9.6@2634.33,3323.82
  BOT w6: v2(2405,3295) 2405,3080 2575,2910 2765,2910 3185,2490 4065,2490 v6(4140,2415)
scan_in_FPGA: P1.8 U4.3 | length 239.4
  TOP w12: U4.3@1750,3473.07 1750,3604.41 1805.59,3660 P1.8@1835,3660
SCAN_OUT: H9.12 U2.A6 U7.2 | length 3226.6
  TOP w3: U2.A6@4108.7,2378.07 4158.07,2378.07 4190,2410 4190,2440 v6(4185,2445)
  TOP w12: U7.2@2164.41,3474.25 2164.41,3398.82 2243.82,3398.82 2478.07,3633.07 v2(2535,3633.07) 2605.75,3633.07 H9.12@2610,3628.82
  BOT w6: v2(2535,3633.07) 2535,3064.49 2598.99,3000.5 2804.5,3000.5 3240,2565 4065,2565 v6(4185,2445)
scan_out_FPGA: P1.4 U7.12 | length 721.8
  TOP w12: P1.4@2034.33,3660 2034.33,3578.74 1964.41,3508.82 1964.41,3213.82 1994.41,3183.82 2119.41,3183.82 2140,3204.41 U7.12@2140,3254.57
THRU_LINK: SMA_THRU_LINK0.1 SMA_THRU_LINK1.1 | length 1685.8
  TOP w3: SMA_THRU_LINK1.1@2534.4,1530.91 2348.34,1530.91 2263.34,1445.91 2263.34,1331.96 2795.25,800.06 SMA_THRU_LINK0.1@2795.25,286.7
THRU_RF: SMA_THRU_RF0.1 SMA_THRU_RF1.1 | length 1606.4
  TOP w3: SMA_THRU_RF0.1@1164.64,380.1 1164.64,495.7 1360.75,691.82 1502.13,691.82 1653.02,842.71 1653.02,1193.87 1713.7,1254.55 1820.91,1254.55 1925.91,1359.55 SMA_THRU_RF1.1@1925.91,1525.6
VDD_BUFFER: C76.1 C77.1 C86.1 C87.1 C88.1 C89.1 FB5.2 R30.1 U19.1 U19.6 U19.11 U19.16 | length 1200.8
  TOP w5.75: v2@4433.94,775.06 v2(4437,772)
  TOP w12: C76.1@4218.05,651.84 4231.9,665.69 4265.05,665.69 ; v2(4238.11,797.06) 4260.11,775.06 U19.11@4276,775.06 ; v2(4252.11,621.06) 4252.11,652.74 4265.05,665.69 ; U19.16@4276,676.63 4265.05,665.69 ; U19.1@4394.11,676.63 4428.9,641.84 v2(4439.05,641.84) ; U19.6@4394.11,775.06 v2@4433.94,775.06 ; v2(4437,772) C77.1@4437,812
  TOP w30: R30.1@4512.05,812 4512.05,799.94 v2(4540,772) v2@4543.53,775.53
  BOT w20: v2(4238.11,797.06) 4238.11,635.06 v2(4252.11,621.06) ; C86.1@4576.05,757 C87.1@4614.05,757 ; FB5.2@4622.05,811 4622.05,765 C87.1@4614.05,757 ; C89.1@4696.05,745 4684.05,757 C88.1@4652.05,757 C87.1@4614.05,757
  BOT w25: 4561.05,772 C86.1@4576.05,757
  BOT w30: v2(4252.11,621.06) 4419.21,621.06 ; 4419.21,622 v2(4439.05,641.84) 4439.05,769.94 v2(4437,772) v2(4540,772) 4561.05,772
VDD_BUFFER_EN: H5.2 U20.8 | length 436.7
  TOP w10: U20.8@4688.44,660.93 4910.93,660.93 4945,695 5005,695 H5.2@5080,620
VDD_BUFFER_REG: C92.1 FB5.1 H25.1 H25.2 TP_VDD_BUFFER.1 U20.3 U20.4 | length 867.5
  TOP w20: v7(4577.05,876) 4622.05,831 ; U20.4@4611.67,777.07 U20.3@4637.26,777.07 ; 4622.05,782.08 4622.05,831 ; v7@4622.05,919 4622.05,831 ; v7(4622.05,923) v7@4626.05,919 ; C92.1@4626.05,817 4626.05,827 ; H25.1@4855,770 4855,810 ; TP_VDD_BUFFER.1@4979.92,809.92 4855.08,809.92 4855,810 ; 4622.05,831 4626.05,827 ; 4626.05,827 4626.05,833 v7(4670.05,877) 4848,877 H25.2@4855,870 4855,810
  BOT w20: v7(4577.05,876) FB5.1@4622.05,876 v7(4622.05,923) ; FB5.1@4623.05,877 v7(4670.05,877)
VDD_FPGA_3P3V: C3.1 C4.1 C10.1 C23.1 C25.1 C26.1 C37.1 C38.1 C40.1 C46.1 C47.1 C63.1 C64.1 C69.1 C70.1 C71.1 C78.1 C95.1 EN_DVDD.1 EN_GATE_LINK.1 EN_VDD_IO.1 EN_VDD_LINK.1 EN_VDDA.1 H7.3 H19.1 H20.1 H20.2 P1.1 P1.2 R13.1 R14.1 R17.1 R18.1 R19.2 R20.2 R21.1 R31.1 U1.10 U2.4 U2.5 U2.20 U3.10 U5.8 U6.8 U8.10 U9.10 U10.9 U10.10 U12.10 U16.10 U21.10 U22.5 U22.20 U32.10 | length 4819.1
  TOP w10: U5.8@1369.71,3260.13 U5.8@1369.71,3274.12
  TOP w12: v2(2917.82,2538.83) R21.1@2917.82,2593.83
  TOP w15: v2(588.41,2665.32) 642.7,2611.03 U22.5@678.05,2611.03
  TOP w20: U22.20@457.58,2508.67 488.98,2508.67 C63.1@544.82,2452.83 C64.1@544.82,2406.83 544.82,2383.83 v2(532.82,2371.83) 524.82,2363.83 C95.1@524.82,2337.83 ; U21.10@479.49,2336.5 480.82,2337.83 C95.1@524.82,2337.83 ; v2(528.82,2295.83) 524.82,2299.83 C95.1@524.82,2337.83 ; v2(859.33,3162.74) R20.2@859.33,3207.74 ; R20.2@859.33,3209.74 860.33,3210.74 R18.1@917.33,3210.74 ; U1.10@985.98,2346.93 C46.1@1043.31,2346.93 ; v2(1043.31,2306.24) C46.1@1043.31,2346.93 ; EN_VDDA.1@1057.82,2583.83 1090.97,2616.97 R31.1@1216.95,2616.97 R31.1@1209.95,2609.97 ; C40.1@1086.31,2307.24 C47.1@1086.31,2346.93 C46.1@1043.31,2346.93 ; C47.1@1086.31,2348.24 1123.15,2348.24 U8.10@1137.56,2362.65 ; R17.1@1111.33,3271.96 R17.1@1111.33,3273.12 ; R19.2@1211.33,3209.74 v2(1211.33,3160.74) 1233.33,3138.74 R14.1@1269.33,3138.74 ; C26.1@1299.82,2364.51 1332.82,2364.51 ; v2(1332.82,2402.83) 1332.82,2364.51 ; C25.1@1351.82,2364.51 1332.82,2364.51 ; C25.1@1361.82,2364.83 1417.82,2364.83 ; U2.20@1797.58,2513.67 1828.98,2513.67 C3.1@1884.82,2457.83 C4.1@1884.82,2411.83 1884.82,2388.83 v2(1872.82,2376.83) 1864.82,2368.83 C37.1@1864.82,2342.83 ; U12.10@1819.49,2341.5 1820.82,2342.83 C37.1@1864.82,2342.83 ; v2(1868.82,2300.83) 1864.82,2304.83 C37.1@1864.82,2342.83 ; U2.4@2018.05,2590.44 U2.5@2018.05,2616.03 2074.02,2616.03 v2(2080.82,2622.83) ; U16.10@2215.98,2336.93 C70.1@2273.31,2336.93 ; v2(2273.31,2296.24) C70.1@2273.31,2336.93 ; C38.1@2316.31,2297.24 C71.1@2316.31,2336.93 C70.1@2273.31,2336.93 ; C71.1@2316.31,2338.24 2353.15,2338.24 U32.10@2367.56,2352.65 ; C78.1@2524.82,2354.51 2557.82,2354.51 v2(2557.82,2392.83) ; 2557.82,2354.39 C69.1@2582.82,2354.55 U9.10@2627.16,2354.83 ; U3.10@3044.49,2331.5 3045.82,2332.83 3089.82,2332.83 3089.82,2294.83 v2(3093.82,2290.83)
  TOP w30: U6.8@1059.33,3273.12 1111.33,3273.12 v2(1111.33,3320.74) ; U5.8@1375.33,3274.12 v2@1484.33,3274.12
  TOP w50: C10.1@676.93,3740 H19.1@815,3740
  BOT w20: 1007.82,2270.75 v2(1043.31,2306.24)
  BOT w30: v2(3093.82,2290.83) 3179.17,2290.83 3225,2245 3225,2150 2965,1890 2965,940 3025,880 H7.3@3625,880
  other v2: 1484.33,3273.74
VDD_IN: C1.1 C8.1 C29.1 C32.1 C67.1 C90.1 C105.1 C113.1 H5.1 H15.1 H15.2 H17.1 H17.2 U1.5 U1.6 U1.7 U1.8 U3.5 U3.6 U3.7 U3.8 U12.5 U12.6 U12.7 U12.8 U16.5 U16.6 U16.7 U16.8 U20.1 U20.2 U21.5 U21.6 U21.7 U21.8 | length 1860
  TOP w20: U21.5@436.18,2190.83 436.18,2164.46 v2(474.82,2125.83) ; 481.16,2225.03 481.07,2234.04 481.16,2235.47 481.18,2235.83 C113.1@524.82,2235.83 524.82,2199.83 v2(532.82,2191.83) ; C1.1@1026.33,2201.26 C1.1@1032.31,2207.24 ; U12.5@1776.18,2195.83 1776.18,2169.46 v2(1814.82,2130.83) ; 1821.16,2230.03 1821.07,2239.04 1821.16,2240.47 1821.18,2240.83 C29.1@1864.82,2240.83 1864.82,2204.83 v2(1872.82,2196.83) ; C32.1@2256.33,2191.26 C32.1@2262.31,2197.24 ; U3.5@3001.18,2185.83 3001.18,2159.46 v2(3039.82,2120.83) ; 3046.16,2220.03 3046.07,2229.04 3046.16,2230.47 3046.18,2230.83 3089.82,2230.83 3089.82,2194.83 v2(3097.82,2186.83) ; U20.2@4662.85,777.07 U20.1@4688.44,777.07 4717.98,777.07 4728,767.05 ; v7(4728,813.05) 4728,767.05 ; C90.1@4755,745 4750.05,745 4728,767.05
  TOP w30: U21.5@436.18,2190.83 479.49,2190.83 481.16,2225.03 481.16,2235.47 481.16,2275.31 ; 952.31,2201.26 980.33,2201.26 ; 985.98,2206.91 985.98,2287.24 ; C1.1@1026.33,2201.26 980.33,2201.26 ; v2(1068.31,2167.24) 1014.35,2167.24 980.33,2201.26 ; U12.5@1776.18,2195.83 1819.49,2195.83 1821.16,2230.03 1821.16,2240.47 1821.16,2280.31 ; 2182.31,2191.26 2210.33,2191.26 ; 2215.98,2196.91 2215.98,2277.24 ; C32.1@2256.33,2191.26 2210.33,2191.26 ; v2(2298.31,2157.24) 2244.35,2157.24 2210.33,2191.26 ; U3.5@3001.18,2185.83 3044.49,2185.83 3046.16,2220.03 3046.16,2230.47 3046.16,2270.31 ; C67.1@5054.89,427.05 C67.1@5059.89,432.05
  TOP w50: C8.1@371.93,1635 H17.2@500,1635 ; H15.1@4943,427.05 C67.1@5054.89,427.05
VDD_IO: C14.1 C48.1 C49.1 C50.1 C51.1 C65.1 FB1.2 H7.1 U2.AB2 U2.AB3 U2.AB24 U2.AB25 U2.AC2 U2.AC3 U2.AC24 U2.AC25 U2.AD2 U2.AD3 U2.AD24 U2.AD25 U2.AE2 U2.AE3 U2.AE24 U2.AE25 U2.B3 U2.B24 U2.B25 U2.C2 U2.C3 U2.C24 U2.C25 U2.D2 U2.D3 U2.D24 U2.D25 U2.E2 U2.E3 U2.E24 U2.E25 U4.13 U7.1 | length 2527.9
  TOP w12: C14.1@1775.91,3188.82 U4.13@1775.91,3226.24 ; U7.1@2191.18,3473.07 2191.18,3500.59 2219.84,3529.24 2219.84,3534.24 ; v2@2243.98,3529.24 v2(2249.41,3523.82)
  TOP w20: FB1.2@1443.04,1985.83 v2(1503.82,1985.83) ; v2(1774.41,3143.82) 1774.41,3147.32 1779.41,3152.32 1775.91,3155.83 C14.1@1775.91,3188.82 ; C65.1@2209.41,3544.67 2219.84,3534.24 ; 2219.84,3529.24 v2@2243.98,3529.24
  BOT w10: C51.1@3888.57,2353.47 C51.1@3888.82,2353.47
  BOT w20: C48.1@3756.57,2365.97 3796.57,2366.19 3836.57,2366.41 3857.57,2366.53 3870.63,2353.47 C51.1@3888.57,2353.47 ; 3861.86,2365.97 v2(3862.87,2390.97)
  BOT w30: v2(2905,1975) 2905,845 2950,800 3735,800 H7.1@3820,885
  other v3: 3964.92,2254.13 4098.84,2253.92 4085.46,2401.22 3951.43,2401.44
VDD_IO_EN: EN_VDD_IO.2 U12.11 | length 855.5
  TOP w12: v2(1517.82,2433.83) 1517.82,2543.83 1532.82,2558.83 v2(1532.82,2568.83) ; v2(1774.82,2436.83) 1776.18,2435.46 U12.11@1776.18,2384.8
  BOT w12: v2(1517.82,2433.83) 1771.82,2433.83 v2(1774.82,2436.83) ; v2(1532.82,2568.83) 1532.82,2823.83 EN_VDD_IO.2@1637.82,2928.83
VDD_IO_FB: U2.19 U12.16 | length 726.4
  TOP w12: v2@1576.82,2395.19 U12.16@1630.51,2341.5 ; U2.19@1797.58,2539.26 1907.38,2539.26 v2(1987.82,2458.83)
  BOT w12: v2(1587.82,2393.83) 1796.83,2393.83 1861.83,2458.83 v2(1987.82,2458.83)
VDD_IO_REG: C31.1 R8.2 R24.1 U10.2 U12.1 U12.18 U12.19 U12.20 | length 1198.9
  TOP w12: v2(1400.82,2128.83) 1400.82,2138.83 1424.13,2162.14 U10.2@1424.13,2201.12 ; v2@1552.82,2332.83 v2(1552.82,2338.83) 1552.82,2508.83 1642.82,2598.83 R8.2@1669.82,2598.83 ; v2(1592.82,2140.83) 1673.82,2140.83
  TOP w20: 1628.82,2200.83 1630.51,2199.13 1633.82,2195.83 ; R24.1@1673.82,2051.83 R24.1@1674.82,2050.83 ; R24.1@1673.82,2071.83 1673.82,2140.83 U12.1@1673.82,2195.83
  TOP w30: C31.1@1579.82,2200.83 1628.82,2200.83 ; 1630.51,2199.13 1630.51,2280.83 ; 1633.82,2195.83 1664.82,2195.83
  BOT w12: v2(1400.82,2128.83) 1580.82,2128.83 v2(1592.82,2140.83) 1592.82,2298.83 v2(1552.82,2338.83)
VDD_IO_RS: FB1.1 H_VDD_IO.1 H_VDD_IO.2 R24.2 TP_VDD_IO.1 U10.3 | length 660.8
  TOP w12: FB1.1@1442.82,2050.83 U10.3@1442.82,2200.12
  TOP w20: FB1.1@1442.82,2050.61 FB1.1@1443.04,2050.83 R24.2@1539.82,2050.83
  TOP w30: TP_VDD_IO.1@1385,1885 1389.14,1889.14 H_VDD_IO.2@1507.82,1889.14 H_VDD_IO.1@1607.82,1889.14 1607.82,1982.83 R24.2@1539.82,2050.83
VDD_LINK: C34.1 C35.1 C36.1 C103.1 FB4.2 U2.B17 U2.B18 U2.C17 U2.C18 | length 251.2
  TOP w20: FB4.2@2402.31,1963.24 2405.54,1960 v2(2470,1960) ; FB4.2@2403.9,1955.83 FB4.2@2406.31,1958.24
  BOT w10: C103.1@4191.65,2196.22 C103.1@4191.9,2196.22
  BOT w20: v2(4150.57,2196.22) C103.1@4191.65,2196.22 ; C103.1@4191.9,2196.22 4209.84,2196.22 4222.9,2183.16 4243.9,2183.28 4283.9,2183.5 C34.1@4323.9,2183.72
  other v3: 4098.68,2300.81
VDD_LINK_EN: EN_VDD_LINK.2 U16.11 | length 745.7
  TOP w12: U16.11@2173.49,2382.72 2417.82,2627.05 v2(2417.82,2703.83)
  BOT w12: EN_VDD_LINK.2@2187.74,2929.06 2192.59,2929.06 v2(2417.82,2703.83)
VDD_LINK_FB: U2.1 U16.16 | length 180.4
  TOP w12: U2.1@2018.05,2513.67 2027,2504.72 U16.16@2027,2336.93
VDD_LINK_REG: C33.1 R3.2 R39.1 U16.1 U16.18 U16.19 U16.20 U32.2 | length 1244
  TOP w12: 2071.25,2126.18 2387.25,2126.18 U32.2@2387.25,2191.24
  TOP w20: 2070.31,2125.24 U16.1@2070.31,2191.26 ; R3.2@2150.82,2574.83 2201.82,2574.83 2237.82,2538.83 2237.82,2478.83 2207.82,2448.83 v2(2167.82,2448.83)
  TOP w30: v2(1972.31,2322.74) 1972.82,2322.22 C33.1@1972.82,2278.83 1989,2262.65 U16.19@2027,2262.65 ; 2027,2277.24 U16.19@2027,2262.65 ; 2062.31,2195.24 2036.28,2195.24 2027,2204.52 U16.19@2027,2262.65 ; R39.1@2070.31,2037.24 2070.31,2125.24
  BOT w12: v2(1972.31,2322.74) 2053.4,2403.83 2122.82,2403.83 v2(2167.82,2448.83)
VDD_LINK_RS: FB4.1 H_VDD_LINK.1 H_VDD_LINK.2 R39.2 TP_VDD_LINK.1 U32.3 | length 770.1
  TOP w20: R39.2@2222.82,2037.02 R39.2@2227.82,2032.02 ; 2327.82,2032.02 2332.82,2037.02 ; FB4.1@2406.94,2037.65 U32.3@2406.94,2191.24
  TOP w30: TP_VDD_LINK.1@2095,1890 2095.86,1889.14 H_VDD_LINK.2@2227.82,1889.14 R39.2@2227.82,2032.02 ; R39.2@2222.82,2037.02 2332.82,2037.02 FB4.1@2406.31,2037.02 ; H_VDD_LINK.1@2327.82,1889.14 2327.82,2032.02
VDD_SCAN_FPGA: C13.1 C66.1 H19.2 R11.1 R12.1 R15.1 R16.1 U4.1 U5.1 U6.1 U7.13 | length 646.7
  TOP w10: v2(859.33,3478.74) R16.1@859.33,3526.74 ; U4.1@1800.91,3481.82 1800.91,3509.74 1809.98,3518.82 C13.1@1834.41,3518.82 ; v2@1834.41,3559.67 1832.84,3561.24 1836.1,3564.51 v2(1836.1,3571.03)
  TOP w12: C66.1@2165.91,3183.82 2165.91,3221.24
  TOP w20: C13.1@1834.41,3518.82 v2@1834.41,3559.67 ; v2(2134.41,3153.82) C66.1@2165.16,3184.57
  TOP w30: U6.1@1057.33,3446.35 1161.71,3446.35 v2(1177.33,3430.74) 1177.33,3529.18 1175.33,3531.18 ; R15.1@1142.33,3531.18 1175.33,3531.18 ; R12.1@1211.33,3531.18 1175.33,3531.18 ; U5.1@1377.33,3447.35 v2(1427.94,3447.35) ; R11.1@1450.33,3531.18 v2(1501.33,3531.18)
VDDA: C5.1 C6.1 C52.1 C53.1 FB10.2 U2.K10 U2.K11 U2.K14 U2.K15 U2.L10 U2.L11 U2.L14 U2.L15 U2.M10 U2.M11 U2.M14 U2.M15 U2.N10 U2.N11 U2.N14 U2.N15 U2.P12 U2.P13 U2.P14 U2.P15 U2.R12 U2.R13 U2.R14 U2.R15 U2.T12 U2.T13 U2.T14 U2.T15 U2.U12 U2.U13 U2.U14 U2.U15 | length 301.3
  TOP w20: FB10.2@1170,1968.24 FB10.2@1176.31,1968.24
  TOP w30: v2(1170,1860) FB10.2@1170,1968.24
  BOT w10: C6.1@4220.92,2474.28 C6.1@4221.18,2474.28
  BOT w20: v2@4230,2420 v2(4225,2425) 4221.18,2428.82 4221.18,2474.28 4253.48,2474.28 C5.1@4265,2462.75 ; C5.1@4273.18,2461.33 4313.18,2461.55 C52.1@4353.18,2461.78
  other v3: 4004.82,2320.77 4031.71,2320.96 4018.56,2334.09 4031.66,2347.68
VDDA_EN: EN_VDDA.2 U1.11 | length 197
  TOP w12: U1.11@943.49,2392.72 943.49,2424.5 v2(957.82,2438.83) EN_VDDA.2@957.82,2583.83
VDDA_FB: U1.16 U2.13 | length 1326.2
  TOP w12: U1.16@797.82,2349.42 797.82,2663.83 826.79,2692.8 U2.13@1797.58,2692.8